# EAGLE board d (EAGLE 7.1.0)
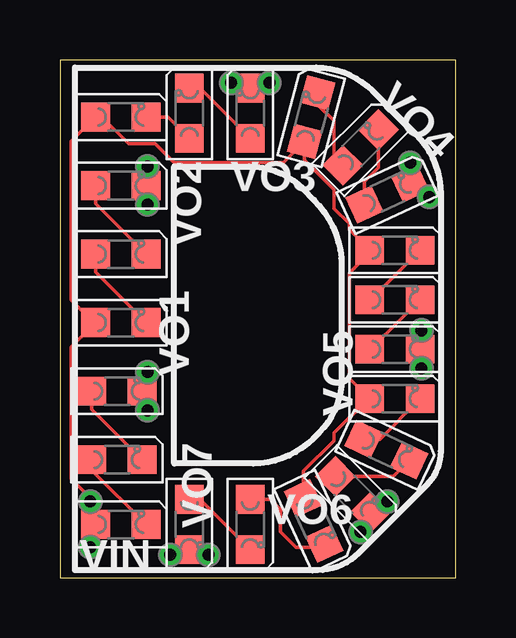
[diagram p0: board, top side]

Size 16.51 x 21.59 mm. Coordinates in mm from the lower left corner, seen from the top.
Outline: 0,0 16.51,0 16.51,21.59 0,21.59 0,0
Copper layers (1*16): Top 0.035mm / dielectric 1.5mm / Bottom 0.035mm
Design rules "Fusion_eagle_rule_v1.1_tms *": minimum track width 6mil, minimum drill 12mil, track to track 6mil, track to pad 6mil, pad to pad 6mil, via to via 6mil, smd to smd 0mil, copper to edge 10mil, drill to drill 10mil, minimum pad ring 10mil, minimum via ring 6mil, stop-mask expansion 2mil, vias tented up to drill 100mil, thermal gap 10mil

## Footprints (pad centres in the part's own frame; a part is rotated, then mirrored left to right if it is on the bottom)
LED_0805 = smd 1.2 x 1.2: A 0,-1.05; C 0,1.05
P1-20 = drill 0.5: TP 0,0

## Placement (x,y rotation side)
LED1  [LED_0805]  2.54,2.22 270 top
LED2  [LED_0805]  2.38,4.92 270 top
LED3  [LED_0805]  2.38,7.78 270 top
LED4  [LED_0805]  2.54,10.64 270 top
LED5  [LED_0805]  2.54,13.49 270 top
LED6  [LED_0805]  2.54,16.35 270 top
LED7  [LED_0805]  2.54,19.21 270 top
LED8  [LED_0805]  5.4,19.37 0 top
LED9  [LED_0805]  7.94,19.37 0 top
LED10  [LED_0805]  10.48,19.21 345 top
LED11  [LED_0805]  12.54,17.94 315 top
LED12  [LED_0805]  13.65,16 295 top
LED13  [LED_0805]  13.97,13.65 270 top
LED14  [LED_0805]  13.97,11.59 270 top
LED15  [LED_0805]  13.97,9.53 270 top
LED16  [LED_0805]  13.97,7.46 270 top
LED17  [LED_0805]  13.61,5.33 245 top
LED18  [LED_0805]  12.22,3.49 225 top
LED19  [LED_0805]  10.59,2.36 205 top
LED20  [LED_0805]  7.94,2.22 180 top
LED21  [LED_0805]  5.4,2.22 180 top
VIN  [P1-20]  1.27,3.17 0 top
VIN1  [P1-20]  1.27,1.27 0 top
VO1  [P1-20]  3.65,8.57 0 top
VO2  [P1-20]  3.65,15.56 0 top
VO3  [P1-20]  7.14,20.64 0 top
VO4  [P1-20]  15.4,15.88 0 top
VO5  [P1-20]  15.08,8.73 0 top
VO6  [P1-20]  12.54,1.91 0 top
VO7  [P1-20]  4.6,0.95 0 top
VO08  [P1-20]  3.65,6.99 0 top
VO09  [P1-20]  3.65,17.14 0 top
VO10  [P1-20]  8.73,20.64 0 top
VO11  [P1-20]  14.61,17.3 0 top
VO12  [P1-20]  15.08,10.32 0 top
VO13  [P1-20]  13.65,3.17 0 top
VO14  [P1-20]  6.19,0.95 0 top

## Library data of the parts
LED1-LED21 VIN VIN1 VO1-VO7 VO08 VO09 VO10-VO14 = CyberRailGuru

## Nets
N$1: LED19.C LED20.A
N$2: LED20.C LED21.A
N$39: LED2.C LED3.A
N$40: LED1.C LED2.A
N$41: LED5.C LED6.A
N$42: LED4.C LED5.A
N$43: LED8.C LED9.A
N$44: LED7.C LED8.A
N$45: LED11.C LED12.A
N$46: LED10.C LED11.A
N$47: LED14.C LED15.A
N$48: LED13.C LED14.A
N$49: LED17.C LED18.A
N$50: LED16.C LED17.A
VIN: LED1.A LED4.A LED7.A LED10.A LED13.A LED16.A LED19.A VIN1.TP VIN.TP
VOUT1: LED3.C VO1.TP VO08.TP
VOUT2: LED6.C VO2.TP VO09.TP
VOUT3: LED9.C VO3.TP VO10.TP
VOUT4: LED12.C VO4.TP VO11.TP
VOUT5: LED15.C VO5.TP VO12.TP
VOUT6: LED18.C VO6.TP VO13.TP
VOUT7: LED21.C VO7.TP VO14.TP

## Tracks (layer width: path | path; a pad name or v marks a point on that pad's centre or on a via)
N$1
  Top 0.152: LED20.A 8.79,3.27 9.21,2.86 9.21,1.91 9.84,1.27 10.89,1.27 LED19.C
N$2
  Top 0.152: LED21.A 5.84,3.27 LED20.C
N$39
  Top 0.152: LED3.A 1.33,7.02 LED2.C
N$40
  Top 0.152: LED2.A 1.33,4.48 LED1.C
N$41
  Top 0.152: LED6.A 1.49,15.59 LED5.C
N$42
  Top 0.152: LED5.A 1.49,12.74 LED4.C
N$43
  Top 0.152: LED8.C 5.84,20.42 LED9.A
N$44
  Top 0.152: LED7.C 4.51,19.21 LED8.A
N$45
  Top 0.152: LED11.C 13.28,17.09 12.7,16.51 LED12.A
N$46
  Top 0.152: LED10.C 10.75,19.73 11.43,19.05 11.43,17.57 LED11.A
N$47
  Top 0.152: LED15.A 12.96,9.53 LED14.C
N$48
  Top 0.152: LED14.A 12.96,11.59 LED13.C
N$49
  Top 0.152: LED18.A 13.91,4.24 LED17.C
N$50
  Top 0.152: LED17.A 13.34,5.78 LED16.C
VIN
  Top 0.152: VIN1.TP 1.49,1.27 LED1.A 1.49,3.17 VIN.TP 1.27,3.33 0.48,4.13 0.48,9.62 LED4.A 1.43,10.64 0.48,11.59 0.48,18.2 LED7.A 1.75,19.21 2.86,18.1 3.97,18.1 4.76,17.3 9.31,17.3 LED10.A 10.21,17.42 11.43,16.19 11.43,15.4 12.06,14.76 12.06,14.51 LED13.A 12.92,13.55 12.06,12.7 12.06,8.32 LED16.A 12.86,7.46 11.43,6.03 11.43,5.71 10.16,4.45 10.16,3.33 LED19.A
VOUT1
  Top 0.152: VO1.TP 3.65,8 LED3.C 3.65,7.56 VO08.TP
VOUT2
  Top 0.152: VO09.TP 3.65,16.41 LED6.C 3.65,16.29 VO2.TP
VOUT3
  Top 0.152: VO10.TP 8.16,20.64 LED9.C 7.72,20.64 VO3.TP
VOUT4
  Top 0.152: VO4.TP 15.18,15.88 LED12.C VO11.TP
VOUT5
  Top 0.152: VO5.TP 15.08,9.46 LED15.C 15.08,9.59 VO12.TP
VOUT6
  Top 0.152: VO6.TP 12.54,2.33 LED18.C 13.39,3.17 VO13.TP
VOUT7
  Top 0.152: VO7.TP 5.18,0.95 LED21.C 5.62,0.95 VO14.TP

## Text on the board
201bmp: D